# Altium PCB AltiumHandbook.PcbDoc
Units mm, origin at the board's own origin, x right, y up, seen from the top; angles counter-clockwise.
Board outline 60 x 30 mm, 4 copper layers (Top Layer, Layer 1, Layer 2, Bottom Layer), stack 1.526 mm thick; 56 components, 43 nets, 136 pads, 107 vias.
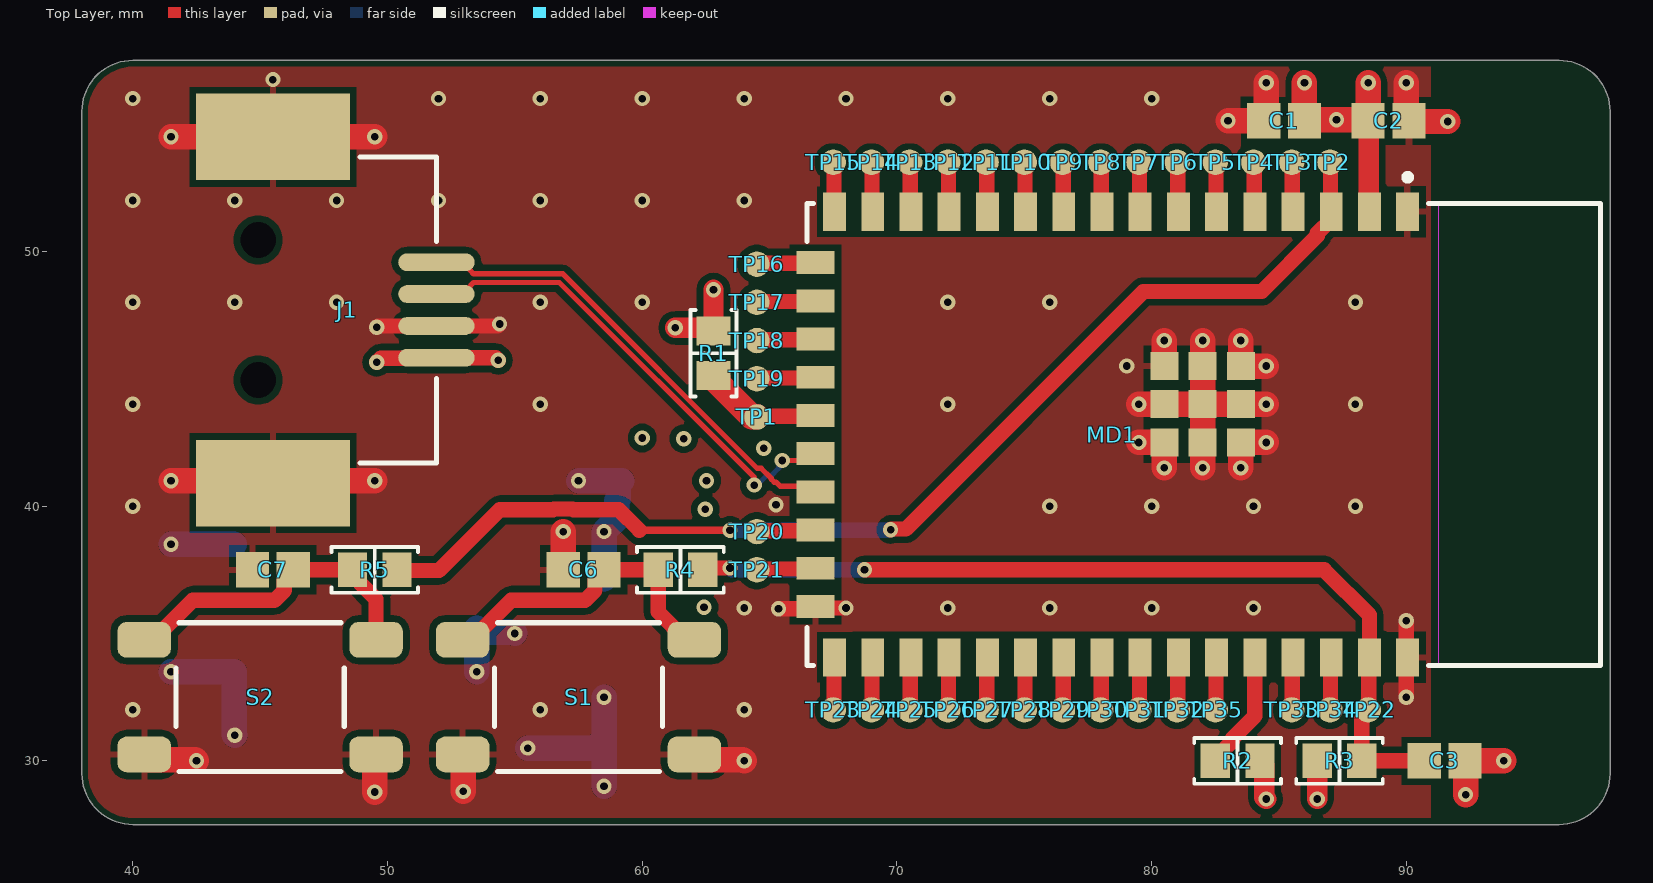
[diagram p0: Top Layer view]
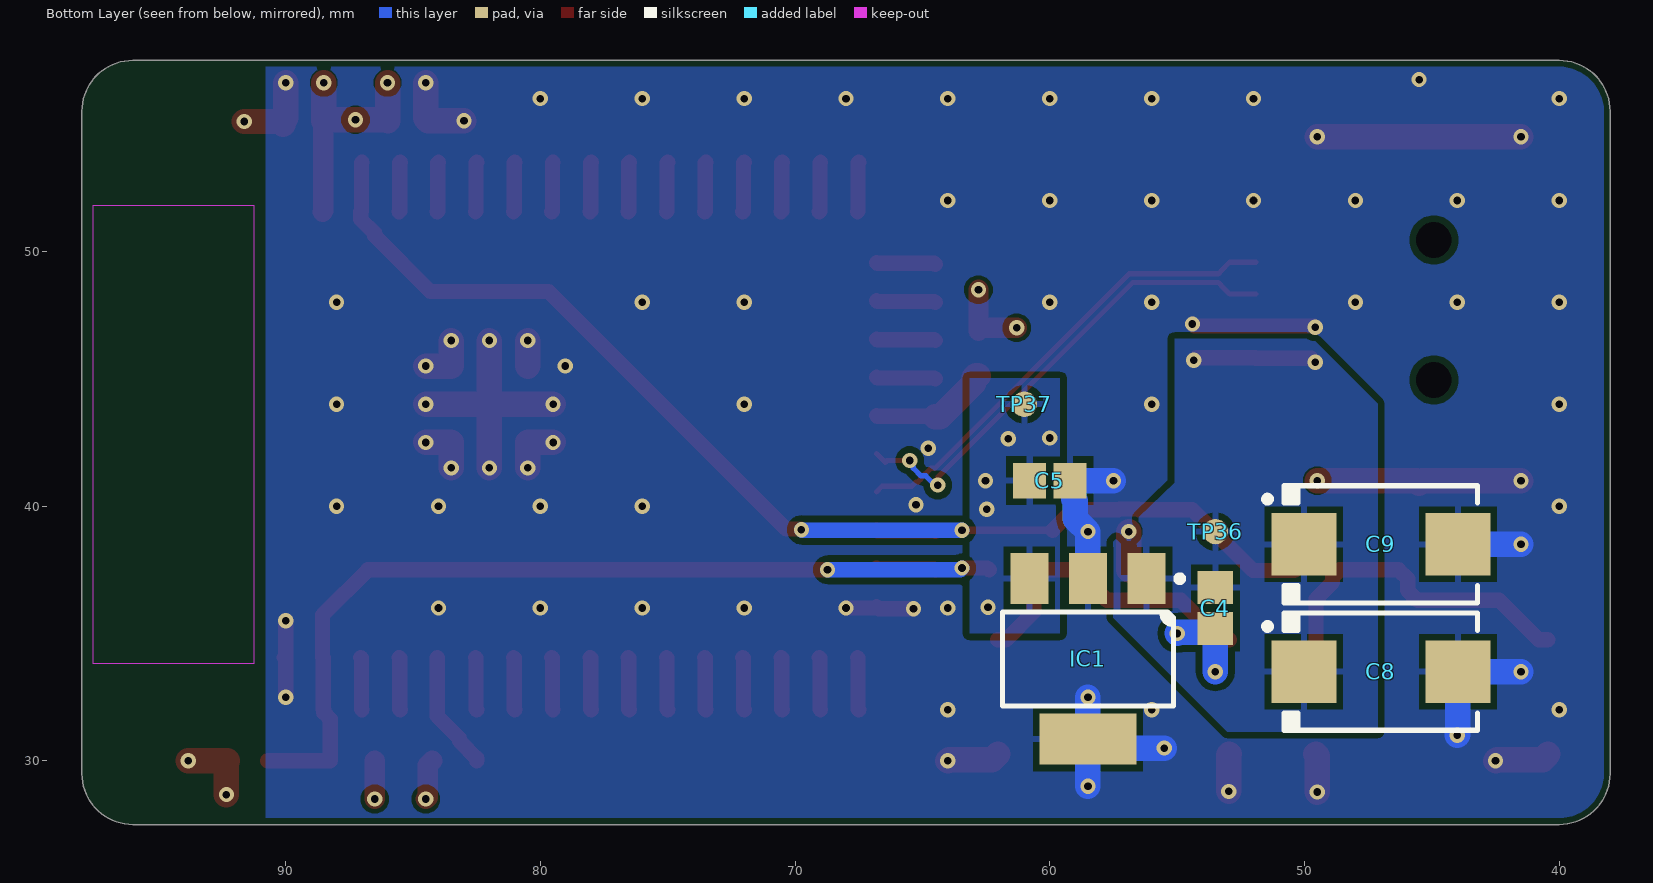
[diagram p1: Bottom Layer view, seen from below]
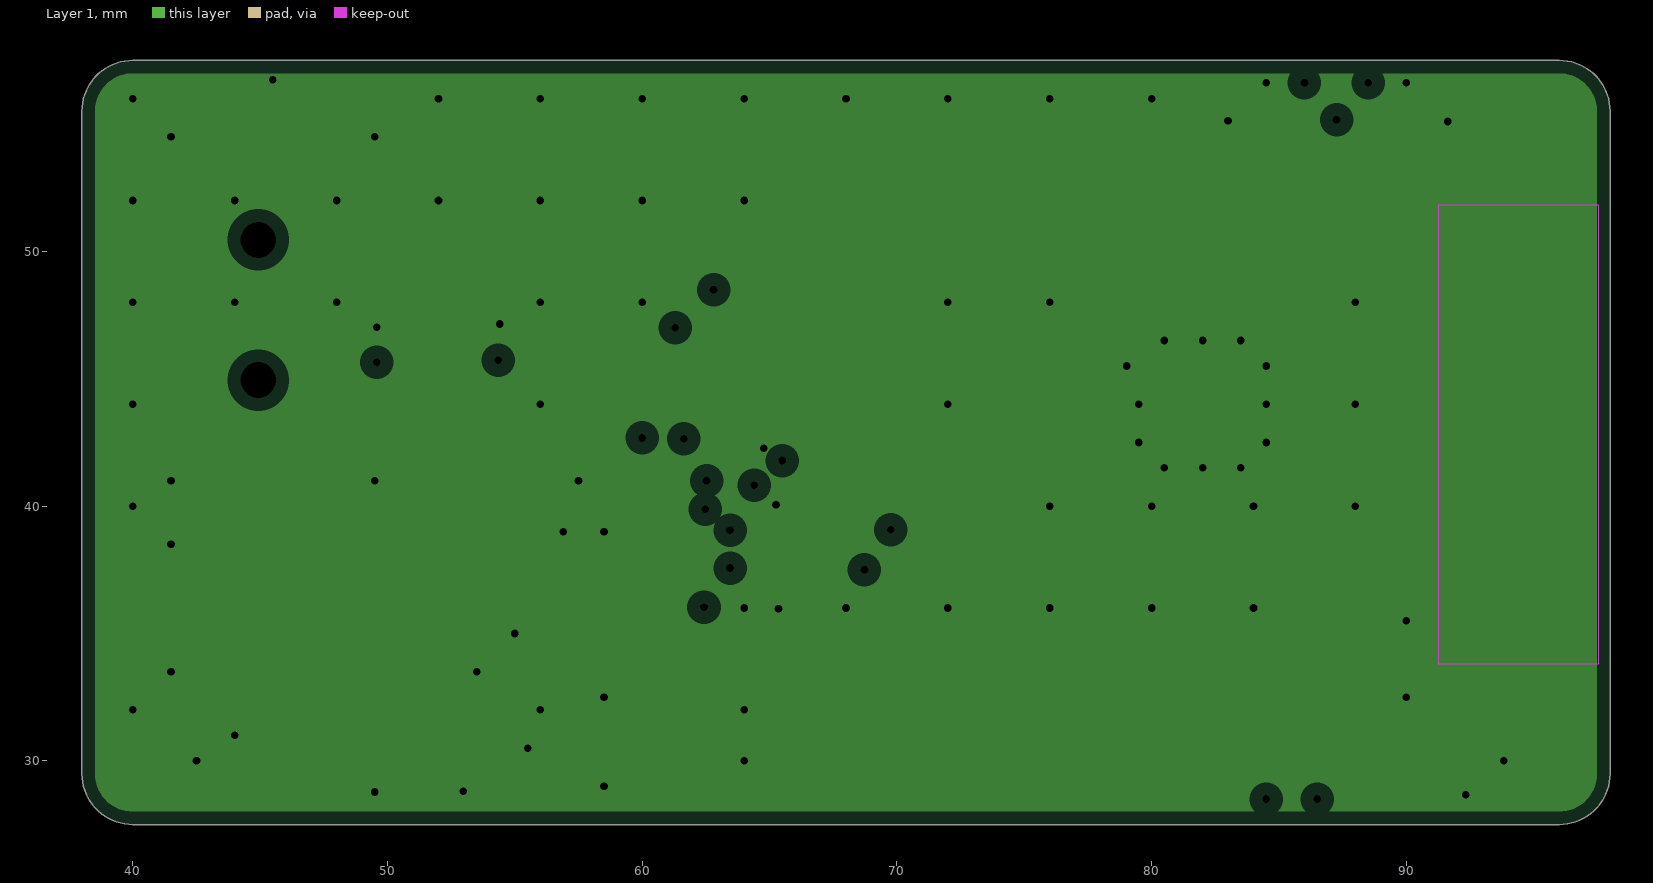
[diagram p2: Layer 1, clearances drawn from the general rule]
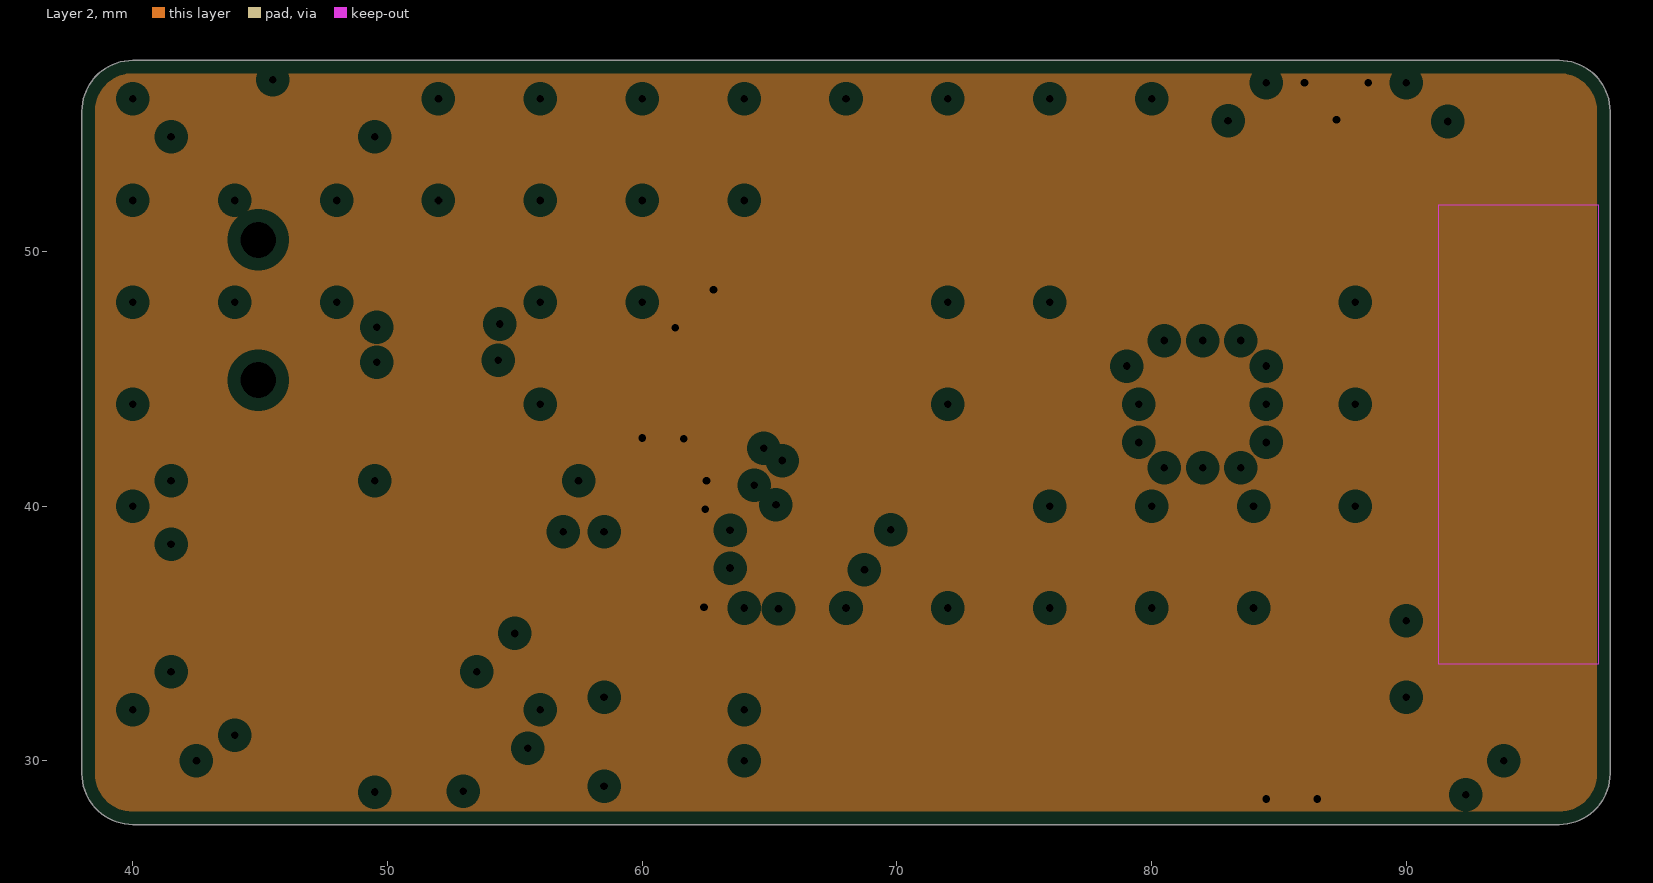
[diagram p3: Layer 2, clearances drawn from the general rule]
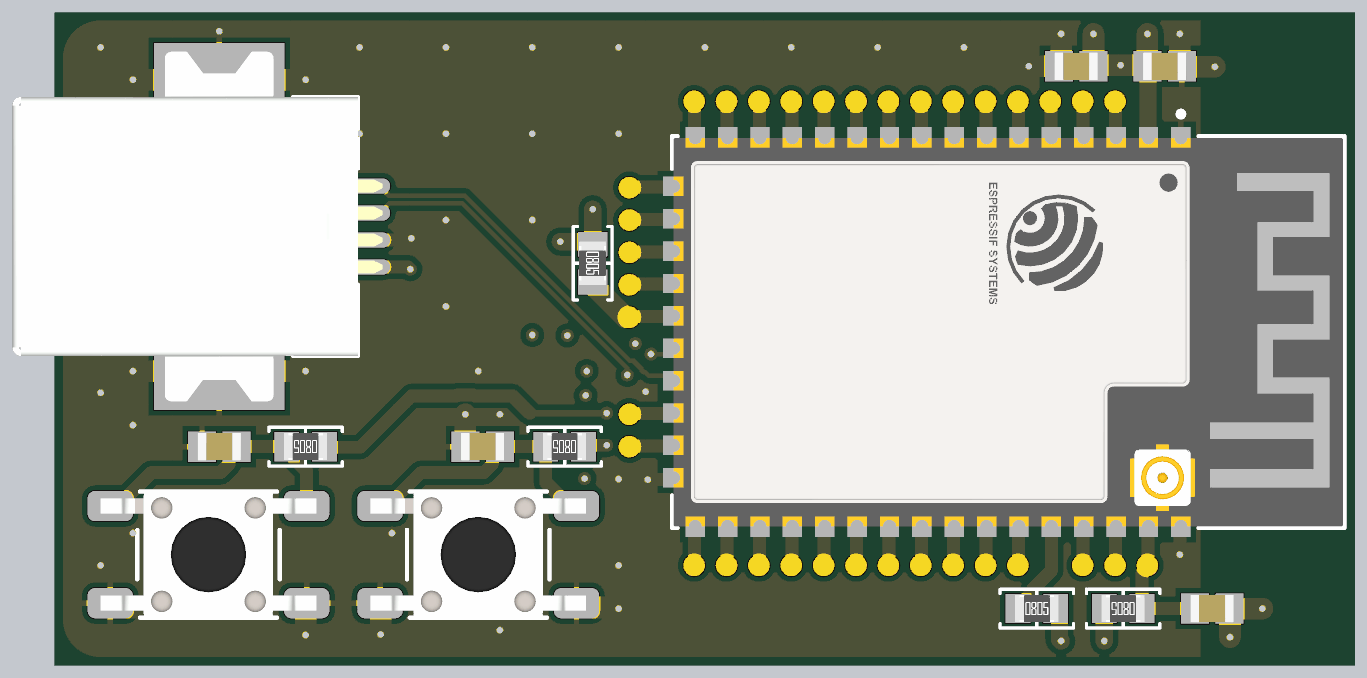
[diagram p4: 3D render of the assembled board from above, using the file's embedded part models]
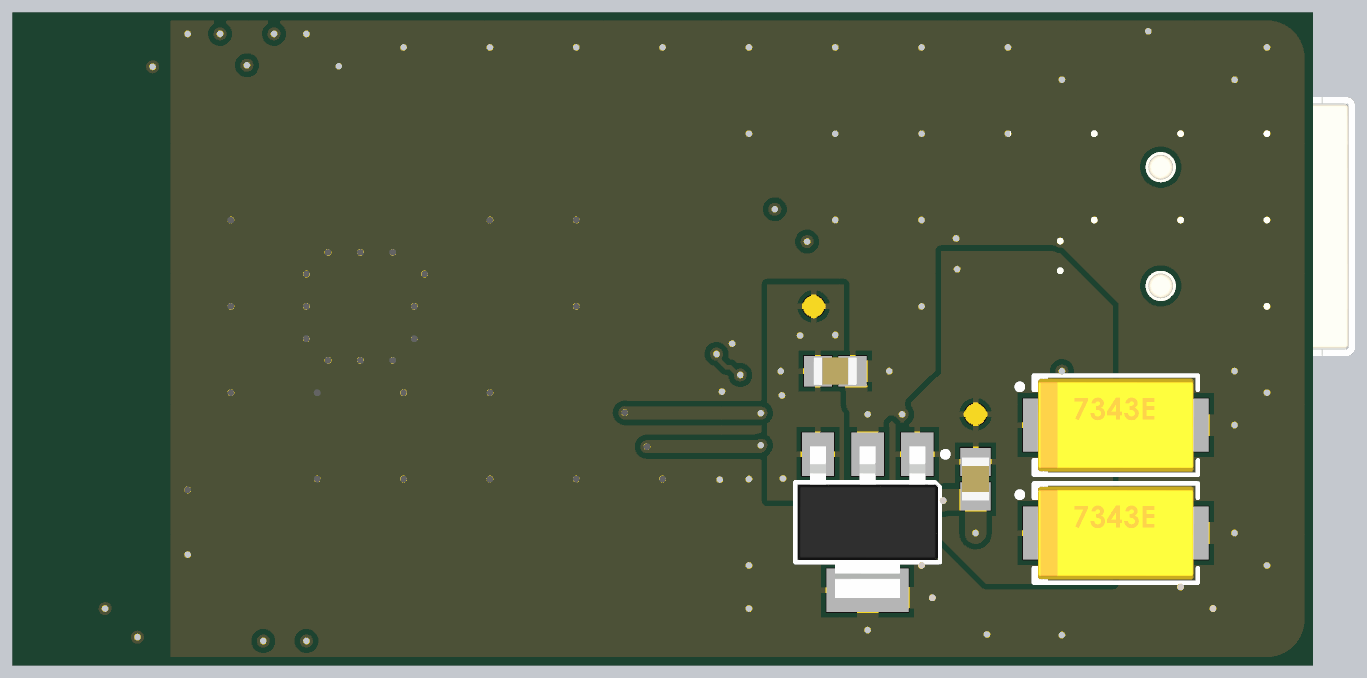
[diagram p5: 3D render of the assembled board from below, using the file's embedded part models]

## Layer stack, top to bottom
Top Solder: solder mask 0.0102, Solder Resist, Dk 3.5
Top Layer: signal copper 0.035
Dielectric 2: prepreg 0.1803, PP-006, Dk 4.6
Layer 1: plane copper 0.0152, net GND
Dielectric 1: dielectric 1.065, FR-4, Dk 4.6
Layer 2: plane copper 0.0152, net 3v3
Dielectric 3: prepreg 0.1803, PP-006, Dk 4.6
Bottom Layer: signal copper 0.035
Bottom Solder: solder mask 0.0102, Solder Resist, Dk 3.5

## Board outline
38,29.5 38,55.5 cw(c40,55.5) 40,57.5 96,57.5 cw(c96,55.5) 98,55.5 98,29.5 cw(c96,29.5) 96,27.5 40,27.5 cw(c40,29.5)

## Design rules (kind name [scope] priority, off if disabled: settings)
BoardOutlineClearance [All] p1: gap=0.254 ignorepadtopadclearanceinfootprint=FALSE except(0: Arc-SplitContinuation Track-SplitContinuation SMDPad-SplitContinuation THPad-SplitContinuation Via-SplitContinuation Fill-SplitContinuation Poly-SplitContinuation Region-SplitContinuation Text-SplitContinuation)
Clearance [All] p1: gap=0.254 ignorepadtopadclearanceinfootprint=FALSE except(0: SMDPad-Hole THPad-Hole Via-Hole Fill-Hole Poly-Hole Region-Hole Text-Hole; 0.09: Arc-Arc Arc-Track Track-Track; 0.127: SMDPad-SMDPad; 0.2: Arc-SMDPad Track-SMDPad; 0.33: Arc-THPad Track-THPad; 0.5: THPad-THPad)
DiffPairsRouting [All] p1: maxlimit=0.127 minlimit=0.127 mostfreqgap=0.127 toplayer_minwidth=0.21 toplayer_maxwidth=0.21 toplayer_prefwidth=0.21 bottomlayer_minwidth=0.21 bottomlayer_maxwidth=0.21 bottomlayer_prefwidth=0.21 impedanceprofiledriven=TRUE impedanceprofileid={DFD841B9-93A9-46CD-8720-BA18417243E9} impedanceprofilevalue=90.000000 maxuncoupledlength=12.7
HoleSize [All] p1: absolutevalues=TRUE maxlimit=6.3 minlimit=0.2 maxpercent=80.000 minpercent=20.000
HoleToHoleClearance [All] p1: gap=0.5 allowstackedmicrovias=TRUE
MinimumAnnularRing [All] p1: minimumring=0.13
MinimumSolderMaskSliver [All] p1: minsoldermaskwidth=0.2
PlaneClearance [All] p1: clearance=0.508
PlaneConnect [All] p1: pad.planeconnectstyle=Relief pad.reliefexpansion=0.508 pad.reliefentries=4 pad.reliefconductorwidth=0.254 pad.reliefairgap=0.254 via.planeconnectstyle=Direct via.reliefexpansion=0.508 via.reliefentries=4 via.reliefconductorwidth=0.254 via.reliefairgap=0.254
PolygonConnect [All] p1: thpad.connectstyle=Relief thpad.reliefconductorwidth=0.254 thpad.reliefentries=4 thpad.polygonreliefangle="90 Angle" thpad.airgapwidth=0.254 smdpad.connectstyle=Relief smdpad.reliefconductorwidth=0.254 smdpad.reliefentries=4 smdpad.polygonreliefangle="90 Angle" smdpad.airgapwidth=0.254 via.connectstyle=Direct via.reliefconductorwidth=0.254 via.reliefentries=4 via.polygonreliefangle="90 Angle" via.airgapwidth=0.254
RoutingVias [All] p1: holewidth=0.3 width=0.6 viastyle="Through Hole" minholewidth=0.2 minwidth=0.45 maxholewidth=6.3 maxwidth=10
SilkToSolderMaskClearance [IsPad] p1: minsilkscreentomaskgap=0.15 clearancetoexposedcopper=TRUE
SolderMaskExpansion SolderMaskExpansion_Via [IsVia] p1: expansion=0.102 istentingtop=TRUE
SolderMaskExpansion [All] p2: expansion=0.05 istentingtop=FALSE
Width [All] p1: maxlimit=2 minlimit=0.009 preferedwidth=0.2
Width "Slik Screen" [All] p2: maxlimit=2 minlimit=0.009 preferedwidth=0.2
23 further rules are at their usual default settings.

## Classes and differential pairs
differential pair class "USB 2.0 90 OHM": USB_D
component class Designator: C8 C9 J1
differential pair USB_D: +USB_D_P -USB_D_N

## Components (designator, comment, footprint, x,y, rotation, side; value= is the part's Value field where it differs from the comment)
C1 "22µF" "CAP 0805_2012" 85.2,55.125 r180 top
C2 "0.1µF" "CAP 0805_2012" 89.3,55.125 r0 top
C3 "10µF" "CAP 0805_2012" 91.5,30 r0 top
C4 "10µF" "CAP 0805_2012" 53.5,36 r90 bottom
C5 "10µF" "CAP 0805_2012" 60,41 r0 bottom
C6 "0.1µF" "CAP 0805_2012" 57.7,37.5 r0 top
C7 "0.1µF" "CAP 0805_2012" 45.5,37.5 r0 top
C8 "100 µF" "CAP POL 2917_7343" 47,33.5 r180 bottom
C9 "100 µF" "CAP POL 2917_7343" 47,38.5 r180 bottom
IC1 "TL1963A-33DCYR" "TI SOT-223 DCY" 58.5,34 r270 bottom
J1 "M701-370442" "HARWIN USB M701-370442" 44.92,47.7 r270 top
MD1 "ESP32-S2-WROOM" FP-ESP32-S2-WROOM-MFG 82.05,42.81 r270 top locked
R1 "10 kOhms" "RES 0805_2012" 62.8,46 r270 top
R2 "10 kOhms" "RES 0805_2012" 83.375,30 r0 top
R3 "10 kOhms" "RES 0805_2012" 87.375,30 r180 top
R4 "0 Ohms" "RES 0805_2012" 61.5,37.5 r180 top
R5 "0 Ohms" "RES 0805_2012" 49.5,37.5 r180 top
S1 "FSM4JSMA" "TE FSM4JSMA" 57.5,32.5 r90 top
S2 "FSM4JSMA" "TE FSM4JSMA" 45,32.5 r90 top
TP1 "TPAD1.0R" TP06R 64.5,43.5 r90 top
TP2 "TPAD1.0R" TP06R 87,53.5 r90 top
TP3 "TPAD1.0R" TP06R 85.5,53.5 r90 top
TP4 "TPAD1.0R" TP06R 84,53.5 r90 top
TP5 "TPAD1.0R" TP06R 82.5,53.5 r90 top
TP6 "TPAD1.0R" TP06R 81,53.5 r90 top
TP7 "TPAD1.0R" TP06R 79.5,53.5 r90 top
TP8 "TPAD1.0R" TP06R 78,53.5 r90 top
TP9 "TPAD1.0R" TP06R 76.5,53.5 r90 top
TP10 "TPAD1.0R" TP06R 75,53.5 r90 top
TP11 "TPAD1.0R" TP06R 73.5,53.5 r90 top
TP12 "TPAD1.0R" TP06R 72,53.5 r90 top
TP13 "TPAD1.0R" TP06R 70.5,53.5 r90 top
TP14 "TPAD1.0R" TP06R 69,53.5 r90 top
TP15 "TPAD1.0R" TP06R 67.5,53.5 r90 top
TP16 "TPAD1.0R" TP06R 64.5,49.5 r90 top
TP17 "TPAD1.0R" TP06R 64.5,48 r90 top
TP18 "TPAD1.0R" TP06R 64.5,46.5 r90 top
TP19 "TPAD1.0R" TP06R 64.5,45 r90 top
TP20 "TPAD1.0R" TP06R 64.5,39 r90 top
TP21 "TPAD1.0R" TP06R 64.5,37.5 r90 top
TP22 "TPAD1.0R" TP06R 88.5,32 r90 top
TP23 "TPAD1.0R" TP06R 67.5,32 r90 top
TP24 "TPAD1.0R" TP06R 69,32 r90 top
TP25 "TPAD1.0R" TP06R 70.5,32 r90 top
TP26 "TPAD1.0R" TP06R 72,32 r90 top
TP27 "TPAD1.0R" TP06R 73.5,32 r90 top
TP28 "TPAD1.0R" TP06R 75,32 r90 top
TP29 "TPAD1.0R" TP06R 76.5,32 r90 top
TP30 "TPAD1.0R" TP06R 78,32 r90 top
TP31 "TPAD1.0R" TP06R 79.5,32 r90 top
TP32 "TPAD1.0R" TP06R 81,32 r90 top
TP33 "TPAD1.0R" TP06R 85.5,32 r90 top
TP34 "TPAD1.0R" TP06R 87,32 r90 top
TP35 "TPAD1.0R" TP06R 82.5,32 r90 top
TP36 "TPAD1.0R" TP06R 53.5,39 r90 bottom
TP37 "TPAD1.0R" TP06R 61,44 r90 bottom

## Footprints (in the part's own frame and the unit in brackets; to place one, negate y for a bottom-side part, rotate by r counter-clockwise, add the part's x,y. Pads: shape width x height; smd on the part's side, far side on the other; paste and mask are expansions set on the pad)
"CAP 0805_2012" [mm] "Chip Capacitor, 2-Leads, Body 2.00x1.20mm, IPC Medium Density"
  rect 1.3x1.4 smd: 1(-0.8,0) 2(0.8,0)
  body extent -1,-0.64 1,0.64, height 1.26
"CAP POL 2917_7343" [mm] "Molded Capacitor, 2-Leads, Body 7.30x4.30mm, IPC Medium Density"
  rect 2.55x2.45 smd: 1(-3.025,0) 2(3.025,0)
  silkscreen extent -4.58,-2.3 3.8,2.3, body extent -3.65,-2.15 3.65,2.15, height 4.1
FP-ESP32-S2-WROOM-MFG [mm]
  rect 1.5x0.9 smd paste+0 mask+0: 1(-8.75,8) 2(-8.75,6.5) 3(-8.75,5) 4(-8.75,3.5) 5(-8.75,2) 6(-8.75,0.5) 7(-8.75,-1) 8(-8.75,-2.5) 9(-8.75,-4) 10(-8.75,-5.5) 11(-8.75,-7) 12(-8.75,-8.5) 13(-8.75,-10) 14(-8.75,-11.5) 15(-8.75,-13) 16(-8.75,-14.5) 27(8.75,-14.5) 28(8.75,-13) 29(8.75,-11.5) 30(8.75,-10) 31(8.75,-8.5) 32(8.75,-7) 33(8.75,-5.5) 34(8.75,-4) 35(8.75,-2.5) 36(8.75,-1) 37(8.75,0.5) 38(8.75,2) 39(8.75,3.5) 40(8.75,5) 41(8.75,6.5) 42(8.75,8)
  rect 0.9x1.5 smd paste+0 mask+0: 17(-6.75,-15.25) 18(-5.25,-15.25) 19(-3.75,-15.25) 20(-2.25,-15.25) 21(-0.75,-15.25) 22(0.75,-15.25) 23(2.25,-15.25) 24(3.75,-15.25) 25(5.25,-15.25) 26(6.75,-15.25)
  rect 1.1x1.1 smd paste+0 mask+0: 43(-2.69,1.45) 43(-2.69,-0.05) 43(-2.69,-1.55) 43(-1.19,1.45) 43(-1.19,-0.05) 43(-1.19,-1.55) 43(0.31,1.45) 43(0.31,-0.05) 43(0.31,-1.55)
  Keep-Out Layer region: -9,9.2 9,9.2 9,15.5 -9,15.5
  Keep-Out Layer region: -9,9.2 9,9.2 9,15.5 -9,15.5
  silkscreen extent -10.22,-15.58 9.08,15.58, body extent -9.6,-16.1 9.6,15.68, height 0.25
"HARWIN USB M701-370442" [mm]
  oval 0.7x3 smd: 1(1.875,7) 2(-0.625,7) 3(-1.875,7) 4(0.625,7)
  rect 0x0 hole 1.4 unplated: M(-2.75,0) M(2.75,0)
  rect 3.4x6.04 smd: S(-6.8,0.58) S(6.8,0.58)
  silkscreen extent -6,4 6,7, body extent -8.1,-9 8.1,8.15, height 11
"RES 0805_2012" [mm] "Chip Resistor, 2-Leads, Body 2.00x1.25mm, IPC Medium Density"
  rect 1.15x1.35 smd: 1(-0.875,0) 2(0.875,0)
  silkscreen extent -1.7,-0.9 1.7,0.9, body extent -1,-0.62 1,0.63, height 0.6
"TE FSM4JSMA" [mm]
  rrect50% 1.4x2.1 smd: 1(2.25,4.55) 2(2.25,-4.55) 3(-2.25,4.55) 4(-2.25,-4.55)
  silkscreen extent -2.92,-3.3 2.92,3.3, body extent -3,-5 3,5, height 5.08
"TI SOT-223 DCY" [mm] "SOT223, 4-Leads, Body 6.50x7.00mm (avg), Pitch 2.30mm, IPC Medium Density"
  rect 2x1.5 smd: 1(-3.15,2.3) 2(-3.15,0) 3(-3.15,-2.3)
  rect 2x3.8 smd: 4(3.15,0)
  silkscreen extent -3.27,-3.35 1.85,3.72, body extent -3.52,-3.25 3.5,3.25, height 1.8
TP06R [mm] "Testpoint, round, d=0.6mm"
  round 1 smd paste-1: 1(0,0)

## Part data
C1: library part 0805ZD226MAT2A, "CAP CER 22UF 10V X5R 0805", Device Package="0805 (2012 Metric)", manufacturer="AVX Corporation", Operating Temperature="-55°C ~ 85°C", Supplier Part Number 1=478-7966-1-ND, Temperature Coefficient=X5R, Tolerance=±20%, Voltage - Rated=10V, Applications="General Purpose", Capacitance=22µF, componentlink1description=Datasheet, componentlink1url=http://datasheets.avx.com/cx5r.pdf, componentlink2description="DigiKey Link", componentlink2url=http://digikey.com/product-detail/en/avx-corporation/0805ZD226MAT2A/478-7966-1-ND/3881589, lastupdated="2/09/2020 1:04:32 AM", Lifecycle Status=Active, Minimum Order=1, Mounting Type="Surface Mount, MLCC", Package / Case="0805 (2012 Metric)", packaging=TapeAndReel, Part Number=0805ZD226MAT2A, Part Status=Active, partid=7750, price=0.10, series=-, Size / Dimension="0.079\" L x 0.049\" W (2.00mm x 1.25mm)", Supplier 1=DigiKey, Thickness (Max)="0.060\" (1.52mm)"
C2: library part 0805ZC104KAT2A, "CAP CER 0.1UF 10V X7R 0805", Device Package="0805 (2012 Metric)", manufacturer="AVX Corporation", Operating Temperature="-55°C ~ 125°C", Supplier Part Number 1=478-7962-1-ND, Temperature Coefficient=X7R, Tolerance=±10%, Voltage - Rated=10V, Applications="General Purpose", Capacitance=0.1µF, componentlink1description=Datasheet, componentlink1url=http://datasheets.avx.com/X7RDielectric.pdf, componentlink2description="DigiKey Link", componentlink2url=http://digikey.com/product-detail/en/avx-corporation/0805ZC104KAT2A/478-7962-1-ND/3881585, lastupdated="2/09/2020 1:04:08 AM", Lifecycle Status=Active, Minimum Order=1, Mounting Type="Surface Mount, MLCC", Package / Case="0805 (2012 Metric)", packaging=TapeAndReel, Part Number=0805ZC104KAT2A, Part Status=Active, partid=17952, price=0.05, series=-, Size / Dimension="0.079\" L x 0.049\" W (2.00mm x 1.25mm)", Supplier 1=DigiKey, Thickness (Max)="0.037\" (0.94mm)"
C3: library part 0805ZD106KAT4A, "CAP CER 10UF 10V X5R 0805", Device Package="0805 (2012 Metric)", manufacturer="AVX Corporation", Operating Temperature="-55°C ~ 85°C", Supplier Part Number 1=478-10579-1-ND, Temperature Coefficient=X5R, Tolerance=±10%, Voltage - Rated=10V, Applications="General Purpose", Capacitance=10µF, componentlink1description=Datasheet, componentlink1url=http://datasheets.avx.com/cx5r.pdf, componentlink2description="DigiKey Link", componentlink2url=http://digikey.com/product-detail/en/avx-corporation/0805ZD106KAT4A/478-10579-1-ND/6797452, lastupdated="2/09/2020 1:04:37 AM", Lifecycle Status=Active, Minimum Order=1, Mounting Type="Surface Mount, MLCC", Package / Case="0805 (2012 Metric)", packaging=TapeAndReel, Part Number=0805ZD106KAT4A, Part Status=Active, partid=5023, price=0.12, series=-, Size / Dimension="0.079\" L x 0.049\" W (2.01mm x 1.25mm)", Supplier 1=DigiKey, Thickness (Max)="0.055\" (1.40mm)"
C4 C5: library part 0805ZD106KAT4A, "CAP CER 10UF 10V X5R 0805", Part Number=0805ZD106KAT4A
C6 C7: library part 0805ZD104KAT2A, "CAP CER 0.1UF 10V X5R 0805", Part Number=0805ZD104KAT2A
C8 C9: library part T491X107K020AT, "CAP TANT 100UF 10% 20V 2917", Part Number=T491X107K020AT
IC1: "IC REG LINEAR 3.3V 1.5A SOT223-4", Current - Output=1.5A, Current - Quiescent (Iq)=1mA, Current - Supply (Max)=80mA, manufacturer="Texas Instruments", Operating Temperature="-40°C ~ 125°C", Package / Case="TO-261-4, TO-261AA", Supplier Device Package=SOT-223-4, Supplier Part Number 1=296-24897-1-ND, Voltage - Input (Max)=20V, Voltage - Output (Min/Fixed)=3.3V, Voltage Dropout (Max)="0.55V @ 1.5A", componentlink1description=Datasheet, componentlink1url=http://www.ti.com/general/docs/suppproductinfo.tsp?distId=10&gotoUrl=http%3A%2F%2Fwww.ti.com%2Flit%2Fgpn%2Ftl1963a, componentlink2description="DigiKey Link", componentlink2url=http://digikey.com/product-detail/en/texas-instruments/TL1963A-33DCYR/296-24897-1-ND/2118661, Control Features=Enable, lastupdated="19/09/2022 2:06:57 PM", Lifecycle Status=Active, Minimum Order=1, Mounting Type="Surface Mount", Number of Regulators=1, Output Configuration=Positive, Output Type=Fixed, packaging=TapeAndReel, Part Number=TL1963A-33DCYR, Part Status=Active, price=1.26, Protection Features="Over Temperature, Reverse Polarity", PSRR="63dB (120Hz)", series=-, Supplier 1=DigiKey
J1: "CONN RCPT USB2.0 TYPEB 4P SMD RA", Part Number=M701-370442
MD1: library part CMP-194065-000020-1, "RX TXRX MOD WIFI SURFACE MOUNT"
R1 R2 R3: library part RK73H2ATTD1002D, "RES 10K OHM 0.5% 1/4W 0805", Device Package="0805 (2012 Metric)", manufacturer="KOA Speer Electronics, Inc.", Operating Temperature="-55°C ~ 155°C", Power (Watts)="0.25W, 1/4W", Ratings=AEC-Q200, Supplier Device Package=0805, Supplier Part Number 1=2019-RK73H2ATTD1002DTR-ND, Temperature Coefficient=±100ppm/°C, Tolerance=±0.5%, componentlink1description=Datasheet, componentlink1url=http://www.koaspeer.com/catimages/Products/RK73H/RK73H.pdf, componentlink2description="DigiKey Link", componentlink2url=https://www.digikey.com/en/products/detail/koa-speer-electronics-inc/RK73H2ATTD1002D/10234245, Composition="Thick Film", Features="Automotive AEC-Q200, Moisture Resistant", Height - Seated (Max)="0.024\" (0.60mm)", lastupdated="19/09/2022 1:36:24 PM", Lifecycle Status=Active, Minimum Order=0, Number of Terminations=2, Package / Case="0805 (2012 Metric)", Part Number=RK73H2ATTD1002D, Part Status=Active, partid=37623, price=0, Resistance="10 kOhms", series=RK73H, Size / Dimension="0.079\" L x 0.049\" W (2.00mm x 1.25mm)", Supplier 1=DigiKey
R4 R5: library part CRCW08050000Z0EBC, "RES 0 OHM JUMPER 1/8W 0805", Part Number=CRCW08050000Z0EBC
S1 S2: "SWITCH TACTILE SPST-NO 0.05A 24V", Contact Rating @ Voltage="0.05A @ 24VDC", manufacturer="TE Connectivity ALCOSWITCH Switches", Operating Force=160gf, Operating Temperature="-35°C ~ 85°C", Supplier Part Number 1=450-1129-ND, Actuator Height off PCB, Vertical=5.00mm, Actuator Orientation="Top Actuated", Actuator Type=Standard, Circuit=SPST-NO, componentlink1description=Datasheet, componentlink1url=https://www.te.com/commerce/DocumentDelivery/DDEController?Action=srchrtrv&DocNm=1308111-1_SWITCHES_CORE_PROGRAM_CATALOG&DocType=CS&DocLang=English, componentlink2description="DigiKey Link", componentlink2url=https://www.digikey.com/en/products/detail/te-connectivity-alcoswitch-switches/FSM4JSMA/525821, Illumination=Non-Illuminated, lastupdated="19/09/2022 2:02:57 PM", Lifecycle Status=Active, Minimum Order=1, Mounting Type="Surface Mount", Outline="6.00mm x 6.00mm", packaging=Bulk, Part Number=FSM4JSMA, Part Status=Active, price=0.14, series=FSMJSMA, Supplier 1=DigiKey, Switch Function=Off-Mom, Termination Style="Gull Wing"
TP1 TP2 TP3 TP4 TP5 TP6 TP7 TP8 TP9 TP10 TP11 TP12 TP13 TP14 TP15 TP16 TP17 TP18 TP19 TP20 TP21 TP22 TP23 TP24 TP25 TP26 TP27 TP28 TP29 TP30 TP31 TP32 TP33 TP34 TP35 TP36 TP37: library part CMP-00028-00010-1, "1.0mm round testpoint", Pins=1

## Via types
v1: diameter 0.6, hole 0.3, Top Layer to Bottom Layer, tented both sides, 107 vias

## Nets (pads, with @x,y where several pads share a name; then routed paths per layer and width w, separated by ;. In a path a pad name is that pad's centre, name@x,y a point inside that pad or via, vN(x,y) a via of type N, cw(c..) or ccw(c..) an arc to the next point about the centre after c; other vN are vias at no path point)
3v3: C1.1 C2.1 C5.2 IC1.3 MD1.2 R1.1 R2.2 R3.2 TP37.1 | length 15.3
  Top Layer w0.8: v1(61.3,47) 62.675,47 R1.1 v1(62.8,48.5) ; R2.2 84.425,29.825 84.425,28.575 v1(84.5,28.5) ; v1(86.5,28.5) R3.2 ; C2.1 C2.1@88.525,55.1 ; C2.1@88.525,54.975 88.525,51.585 MD1.2
  Top Layer w1: v1(86,56.625) C1.1 86.048,55.173 v1(87.258,55.173) 88.452,55.173 C2.1 v1(88.5,56.625)
  other v1: 62.425,36.025 62.475,39.875 62.525,41 61.625,42.65 60,42.675
+5: C4.2 C8.1 C9.1 IC1.1 J1.1 TP36.1 | length 4.9
  Top Layer w0.6: v1(49.575,45.65) 49.731,45.806 51.901,45.806 J1.1 54.25,45.825 v1(54.352,45.723)
EN: C3.1 MD1.41 R3.1 R4.1 TP22.1 | length 35.3
  Top Layer w0.6: R4.1 62.443,37.568 v1(63.448,37.568) ; v1(68.725,37.5) 86.775,37.5 88.55,35.725 MD1.41 88.525,34.035 88.525,32.025 TP22.1 88.5,31.892 88.25,31.642 R3.1 C3.1
  Bottom Layer w0.6: v1(63.448,37.568) 63.516,37.5 v1(68.725,37.5)
GND: C1.2 C2.2 C3.2 C4.1 C5.1 C6.1 C7.1 C8.2 C9.2 IC1.2 IC1.4 J1.4 J1.S MD1.1 MD1.26 MD1.42 MD1.43 S1.3 S1.4 S2.3 S2.4 | length 84.6
  Top Layer w0.6: v1(49.575,47.025) 49.625,47.075 54.325,47.075 v1(54.4,47.15) ; v1(65.35,35.975) 66.715,35.975 MD1.26 66.86,36 v1(68,36) ; v1(90,32.5) 90,34.01 MD1.42 90,34.11 v1(90,35.5)
  Top Layer w1: S2.3 40.65,30.05 42.45,30.05 v1(42.5,30) ; v1(41.5,41) 45.4,41 45.5,40.9 45.6,41 v1(49.5,41) ; v1(41.5,54.5) 45.5,54.5 v1(49.5,54.5) ; v1(49.5,28.775) 49.5,30.2 S2.4 ; S1.3 52.975,30.225 v1(52.975,28.8) ; C6.1@56.813,37.506 C6.1 v1(56.9,39) ; S1.4 62.25,30.05 63.95,30.05 v1(64,30) ; v1(79.5,42.5) 80.5,42.5 v1(80.5,41.5) ; v1(79.5,44) 80.5,44 MD1.43@82,44 ; MD1.43@80.5,45.5 v1(80.5,46.5) ; v1(82,41.5) 82,42.5 MD1.43@82,44 ; v1(82,46.5) 82,45.5 MD1.43@82,44 ; v1(83,55.125) C1.2 84.5,55.225 v1(84.5,56.625) ; v1(83.5,41.5) 83.5,42.5 v1(84.5,42.5) ; v1(83.5,46.5) 83.5,45.5 v1(84.5,45.5) ; v1(84.5,44) 83.5,44 MD1.43@82,44 ; v1(90,56.625) 90,55.225 C2.2 ; C2.2@90.1,55 90.2,55.1 v1(91.625,55.1) ; v1(92.325,28.675) 92.325,29.975 C3.2 v1(93.825,30)
  Bottom Layer w1: v1(41.5,33.5) C8.2 43.975,31.025 v1(44,31) ; v1(41.5,38.5) C9.2 ; v1(53.5,33.496) C4.1 53.65,35.05 54.95,35.05 v1(55,35) ; v1(55.5,30.5) 58.15,30.5 IC1.4 ; v1(57.5,41) C5.1 59.05,40.85 59.05,40.264 59,40.214 59,39.5 v1(58.5,39) IC1.2 ; v1(58.5,29) IC1.4 ; v1(58.5,32.5) IC1.4
  other v1: 40,32 56,32 64,32 64,36 72,36 76,36 80,36 84,36 40,40 76,40 80,40 84,40 88,40 65.25,40.05 64.775,42.275 40,44 56,44 72,44 88,44 79.025,45.5 40,48 44,48 48,48 56,48 60,48 72,48 76,48 88,48 40,52 44,52 48,52 52,52 56,52 60,52 64,52 40,56 52,56 56,56 60,56 64,56 68,56 72,56 76,56 80,56 45.5,56.746
IO0: MD1.3 R5.1 TP2.1 | length 45.4
  Top Layer w0.3: 59.886,39.053 v1(63.447,39.053)
  Top Layer w0.6: R5.1 50.4,37.475 52.025,37.475 54.404,39.854 56.495,39.854 56.531,39.89 57.269,39.89 57.305,39.854 59.085,39.854 59.886,39.053 ; v1(69.75,39.075) 69.775,39.1 70.35,39.1 79.675,48.425 84.322,48.425 86.5,50.603 86.5,50.71 87.05,51.26 MD1.3 87.025,51.585 87.025,53.475 TP2.1
  Bottom Layer w0.6: v1(63.447,39.053) 69.728,39.053 v1(69.75,39.075)
IO1: MD1.4 TP3.1 | length 2
  Top Layer w0.6: TP3.1 85.525,53.475 85.525,51.585 MD1.4
IO2: MD1.5 TP4.1 | length 2
  Top Layer w0.6: TP4.1 84.025,53.475 84.025,51.585 MD1.5
IO3: MD1.6 TP5.1 | length 2
  Top Layer w0.6: TP5.1 82.525,53.475 82.525,51.585 MD1.6
IO4: MD1.7 TP6.1 | length 2
  Top Layer w0.6: TP6.1 81.025,53.475 81.025,51.585 MD1.7
IO5: MD1.8 TP7.1 | length 2
  Top Layer w0.6: TP7.1 79.525,53.475 79.525,51.585 MD1.8
IO6: MD1.9 TP8.1 | length 2
  Top Layer w0.6: TP8.1 78.025,53.475 78.025,51.585 MD1.9
IO7: MD1.10 TP9.1 | length 2
  Top Layer w0.6: TP9.1 76.525,53.475 76.525,51.585 MD1.10
IO8: MD1.11 TP10.1 | length 2
  Top Layer w0.6: TP10.1 75.025,53.475 75.025,51.585 MD1.11
IO9: MD1.12 TP11.1 | length 2
  Top Layer w0.6: TP11.1 73.525,53.475 73.525,51.585 MD1.12
IO10: MD1.13 TP12.1 | length 2
  Top Layer w0.6: TP12.1 72.025,53.475 72.025,51.585 MD1.13
IO11: MD1.14 TP13.1 | length 2
  Top Layer w0.6: TP13.1 70.525,53.475 70.525,51.585 MD1.14
IO12: MD1.15 TP14.1 | length 2
  Top Layer w0.6: TP14.1 69.025,53.475 69.025,51.585 MD1.15
IO13: MD1.16 TP15.1 | length 2
  Top Layer w0.6: TP15.1 67.525,53.475 67.525,51.585 MD1.16
IO14: MD1.17 TP16.1 | length 2.3
  Top Layer w0.6: TP16.1 64.53,49.53 66.77,49.53 MD1.17
IO15: MD1.18 TP17.1 | length 2.3
  Top Layer w0.6: TP17.1 64.53,48.03 66.77,48.03 MD1.18
IO16: MD1.19 TP18.1 | length 2.3
  Top Layer w0.6: TP18.1 64.53,46.53 66.77,46.53 MD1.19
IO17: MD1.20 TP19.1 | length 2.3
  Top Layer w0.6: TP19.1 64.53,45.03 66.77,45.03 MD1.20
IO18: MD1.21 R1.2 TP1.1 | length 4.8
  Top Layer w0.6: TP1.1 64.53,43.53 66.77,43.53 MD1.21
  Top Layer w1: R1.2 62.9,45.125 62.975,45.05 62.975,44.828 64.303,43.5 TP1.1
IO21: MD1.24 TP20.1 | length 2.3
  Top Layer w0.6: TP20.1 64.53,39.03 66.77,39.03 MD1.24
IO26: MD1.25 TP21.1 | length 2.3
  Top Layer w0.6: TP21.1 64.53,37.53 66.77,37.53 MD1.25
IO33: MD1.27 TP23.1 | length 2.1
  Top Layer w0.6: TP23.1 67.525,32.025 67.525,34.035 MD1.27
IO34: MD1.28 TP24.1 | length 2.1
  Top Layer w0.6: TP24.1 69.025,32.025 69.025,34.035 MD1.28
IO35: MD1.29 TP25.1 | length 2.1
  Top Layer w0.6: TP25.1 70.525,32.025 70.525,34.035 MD1.29
IO36: MD1.30 TP26.1 | length 2.1
  Top Layer w0.6: TP26.1 72.025,32.025 72.025,34.035 MD1.30
IO37: MD1.31 TP27.1 | length 2.1
  Top Layer w0.6: TP27.1 73.525,32.025 73.525,34.035 MD1.31
IO38: MD1.32 TP28.1 | length 2.1
  Top Layer w0.6: TP28.1 75.025,32.025 75.025,34.035 MD1.32
IO39: MD1.33 TP29.1 | length 2.1
  Top Layer w0.6: TP29.1 76.525,32.025 76.525,34.035 MD1.33
IO40: MD1.34 TP30.1 | length 2.1
  Top Layer w0.6: TP30.1 78.025,32.025 78.025,34.035 MD1.34
IO41: MD1.35 TP31.1 | length 2.1
  Top Layer w0.6: TP31.1 79.525,32.025 79.525,34.035 MD1.35
IO42: MD1.36 TP32.1 | length 2.1
  Top Layer w0.6: TP32.1 81.025,32.025 81.025,34.035 MD1.36
IO43: MD1.39 TP33.1 | length 2.1
  Top Layer w0.6: TP33.1 85.525,32.025 85.525,34.035 MD1.39
IO44: MD1.40 TP34.1 | length 2.1
  Top Layer w0.6: TP34.1 87.025,32.025 87.025,34.035 MD1.40
NetC6_2: C6.2 R4.2 S1.1 S1.2 | length 12.6
  Top Layer w0.6: S1.1 53.3,34.75 54.85,36.3 57.757,36.3 58.15,36.693 58.15,37.15 C6.2 R4.2 60.625,35.852 61.727,34.75 S1.2
NetC7_2: C7.2 R5.2 S2.1 S2.2 | length 12.7
  Top Layer w0.6: S2.1 40.8,34.75 42.35,36.3 45.557,36.3 45.95,36.693 45.95,37.15 C7.2 R5.2 48.9,37.225 48.9,37 49.55,36.35 S2.2
RXD0_2: MD1.38 R2.1 | length 4.7
  Top Layer w0.6: R2.1 82.5,30.1 83.175,30.775 83.175,30.882 84.05,31.757 MD1.38
TXD0_2: MD1.37 TP35.1 | length 2.1
  Top Layer w0.6: TP35.1 82.525,32.025 82.525,34.035 MD1.37
USB_D_N: J1.2 MD1.22 | length 19.2
  Top Layer w0.21: J1.2 52.937,48.325 53.257,48.644 53.257,48.659 53.38,48.782 56.742,48.782 64.4,41.124 v1(64.4,40.825) ; v1(65.5,41.79) 66.379,41.79 66.455,41.715 MD1.22
  Bottom Layer w0.21: v1(64.4,40.825) 64.506,40.825 64.868,41.187 65.056,41.187 65.355,41.486 65.355,41.54 65.5,41.685 v1(65.5,41.79)
USB_D_P: J1.3 MD1.23 | length 18.6
  Top Layer w0.21: J1.3 52.937,49.575 53.257,49.256 53.257,49.241 53.38,49.118 56.882,49.118 64.516,41.484 64.673,41.484 65.059,41.098 65.059,41.064 65.182,40.941 65.25,40.941 65.409,40.782 66.578,40.782 MD1.23
pads on no net: J1.M

## Polygon pours and split planes (outlines as drawn)
GND on Bottom Layer "GND_L04_P002" (solid, pour order 2): 90.789,26.05 33.775,26.05 33.775,61.55 90.789,61.55
3v3 on Bottom Layer "3V3_L04_P001" (solid, pour order 1): 63.15,35 63.15,45.025 59.6,45.025 59.6,35
+5 on Bottom Layer "+5_L04_P000" (solid, pour order 0): 57.5,35.625 53.025,31.15 47.125,31.15 47.125,44.025 49.675,46.575 55.1,46.575 55.1,40.908 57.5,38.6
GND on Top Layer "GND_L01_P003" (solid, pour order 3): 90.959,25.954 33.722,25.954 33.722,61.454 90.959,61.454
3v3 on Layer 2 (split plane): 96.167,56.982 96.332,56.954 96.493,56.908 96.647,56.844 96.794,56.763 96.93,56.666 97.055,56.555 97.166,56.43 97.263,56.294 97.344,56.147 97.408,55.993 97.454,55.832 97.482,55.667 97.491,55.515 97.49,55.5 97.49,29.5 97.491,29.485 97.482,29.333 97.454,29.168 97.408,29.007 97.344,28.853 97.263,28.706 97.166,28.57 97.055,28.445 96.93,28.334 96.794,28.237 96.647,28.156 96.493,28.092 96.332,28.046 96.167,28.018 96.015,28.009 96,28.01 40,28.01 39.985,28.009 39.833,28.018 39.668,28.046 39.507,28.092 39.353,28.156 39.206,28.237 39.07,28.334 38.945,28.445 38.834,28.57 38.737,28.706 38.656,28.853 38.592,29.007 38.546,29.168 38.518,29.333 38.509,29.485 38.51,29.5 38.51,55.5 38.509,55.515 38.518,55.667 38.546,55.832 38.592,55.993 38.656,56.147 38.737,56.294 38.834,56.43 38.945,56.555 39.07,56.666 39.206,56.763 39.353,56.844 39.507,56.908 39.668,56.954 39.833,56.982 39.985,56.991 40,56.99 96,56.99 96.015,56.991
GND on Layer 1 (split plane): 96.167,56.982 96.332,56.954 96.493,56.908 96.647,56.844 96.794,56.763 96.93,56.666 97.055,56.555 97.166,56.43 97.263,56.294 97.344,56.147 97.408,55.993 97.454,55.832 97.482,55.667 97.491,55.515 97.49,55.5 97.49,29.5 97.491,29.485 97.482,29.333 97.454,29.168 97.408,29.007 97.344,28.853 97.263,28.706 97.166,28.57 97.055,28.445 96.93,28.334 96.794,28.237 96.647,28.156 96.493,28.092 96.332,28.046 96.167,28.018 96.015,28.009 96,28.01 40,28.01 39.985,28.009 39.833,28.018 39.668,28.046 39.507,28.092 39.353,28.156 39.206,28.237 39.07,28.334 38.945,28.445 38.834,28.57 38.737,28.706 38.656,28.853 38.592,29.007 38.546,29.168 38.518,29.333 38.509,29.485 38.51,29.5 38.51,55.5 38.509,55.515 38.518,55.667 38.546,55.832 38.592,55.993 38.656,56.147 38.737,56.294 38.834,56.43 38.945,56.555 39.07,56.666 39.206,56.763 39.353,56.844 39.507,56.908 39.668,56.954 39.833,56.982 39.985,56.991 40,56.99 96,56.99 96.015,56.991

## Silkscreen, mask and mechanical layers (free items; w line width, h text height)
Board Shape:
  the board outline again, w0.254